# Altium PCB CircleValve.PcbDoc
Units mil, origin at the board's own origin, x right, y up, seen from the top; angles counter-clockwise.
Board outline 2125.98 x 2125.98 mil, 2 copper layers (Top Layer, Bottom Layer); 100 components, 67 nets, 310 pads, 110 vias.
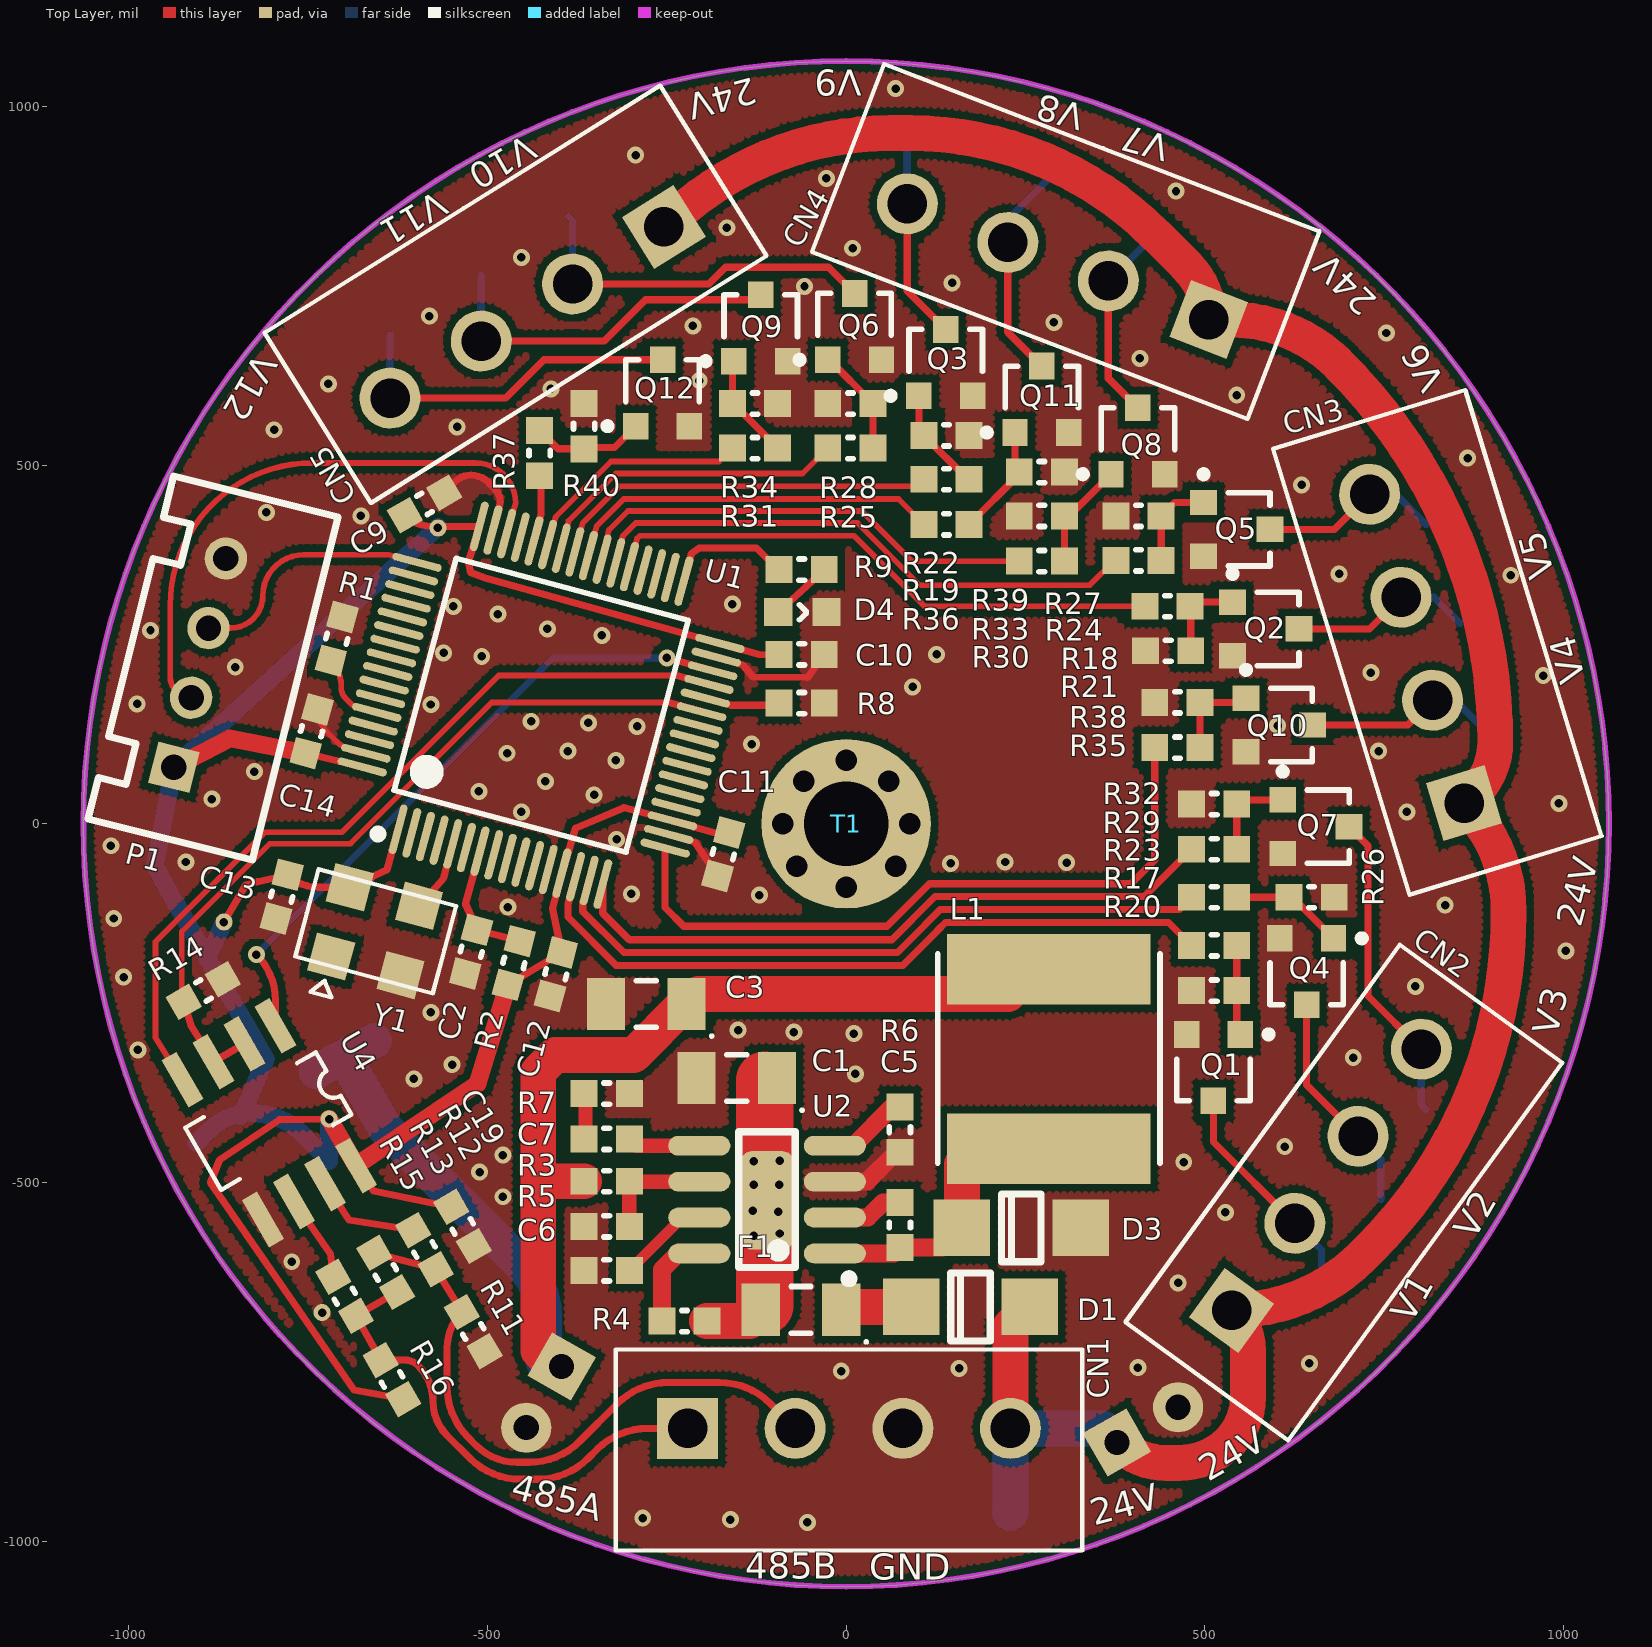
[diagram p0: Top Layer view]
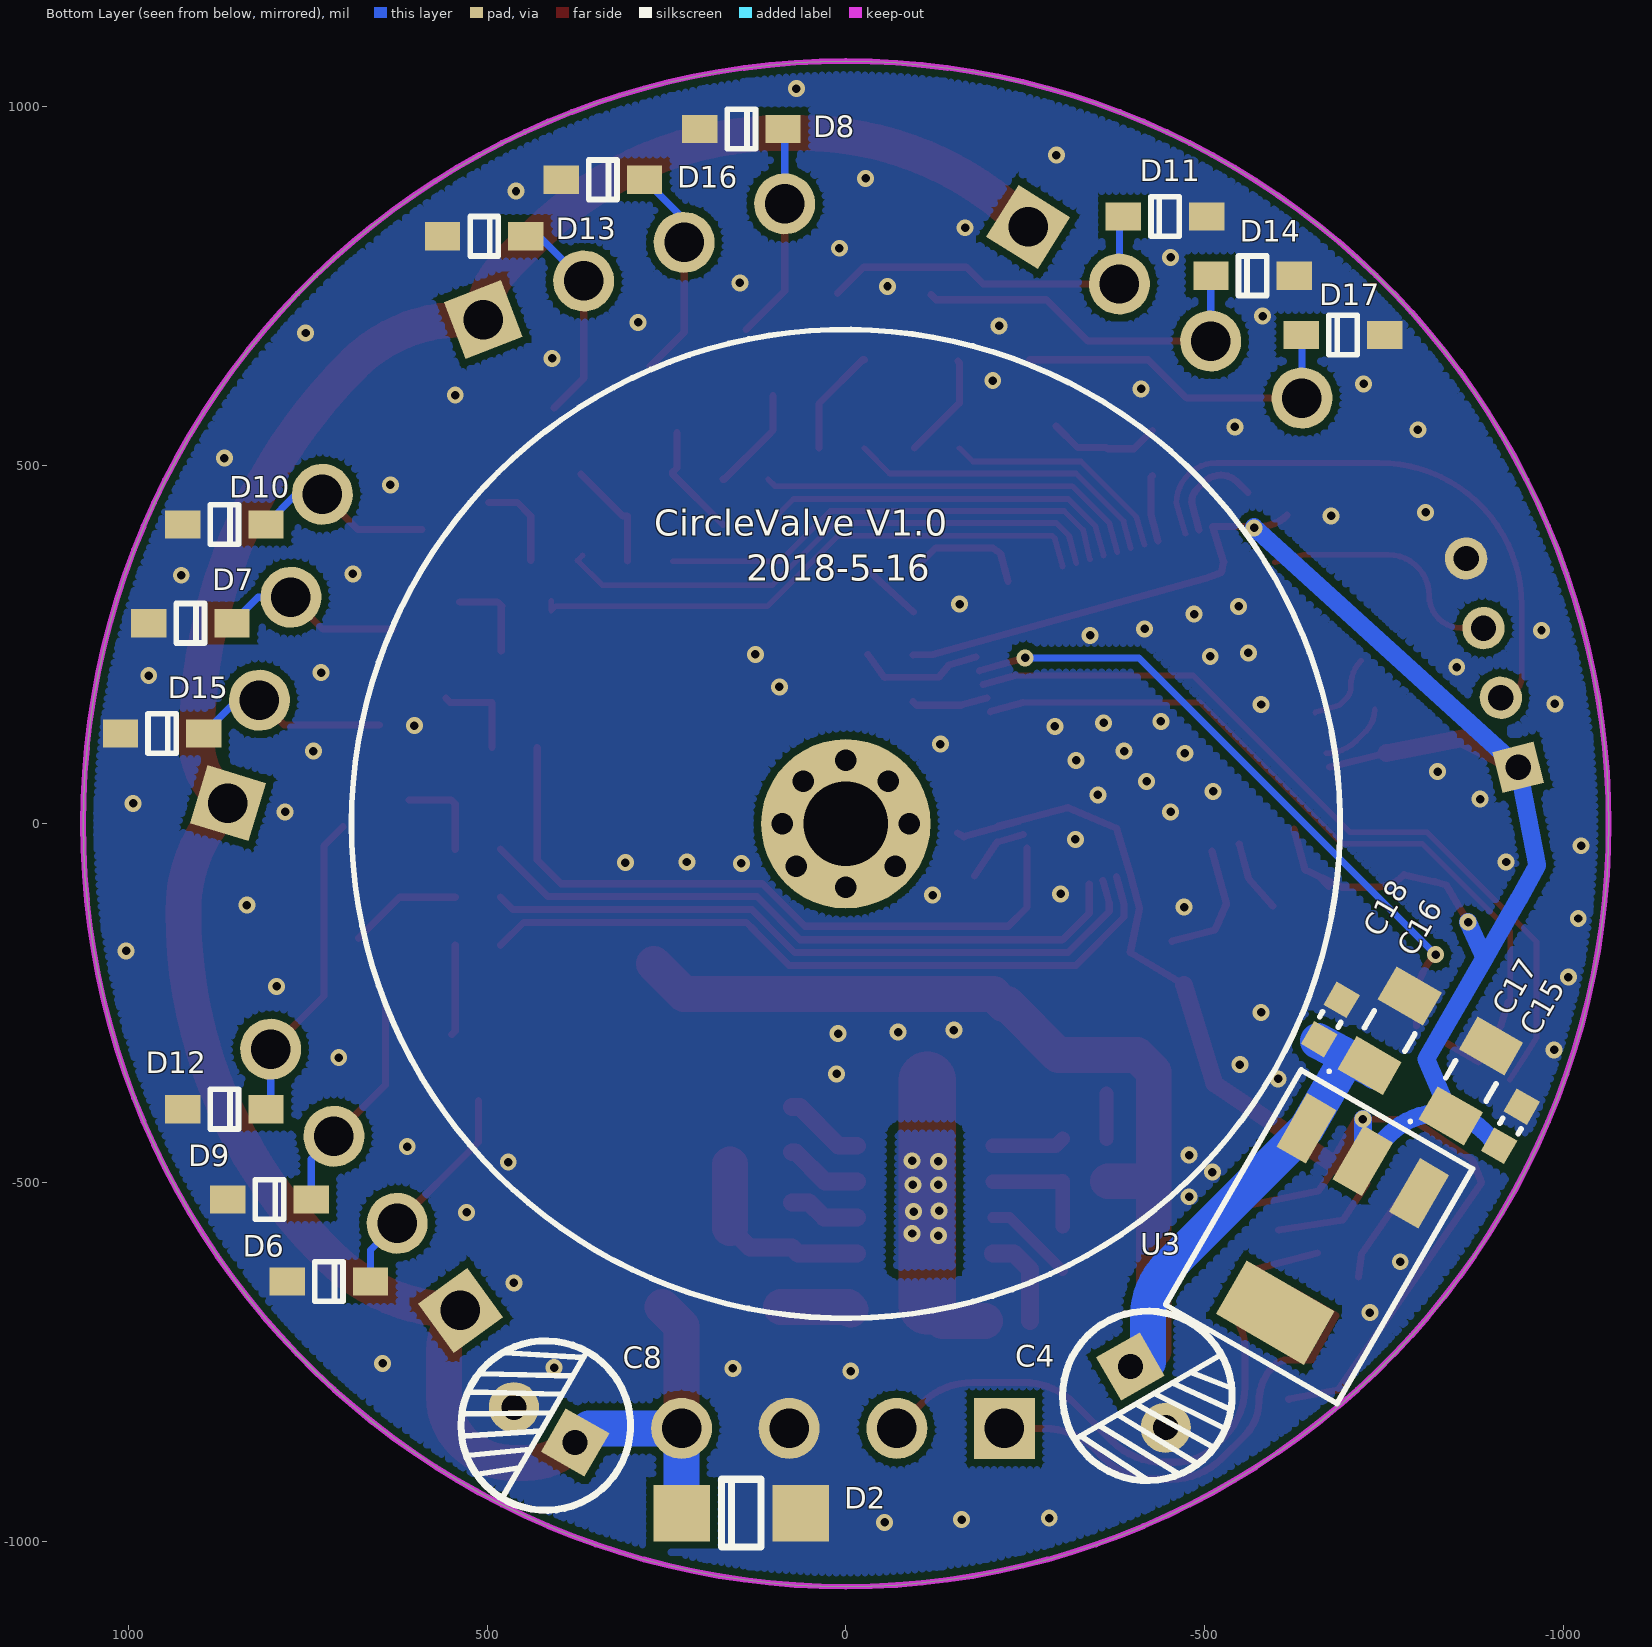
[diagram p1: Bottom Layer view, seen from below]
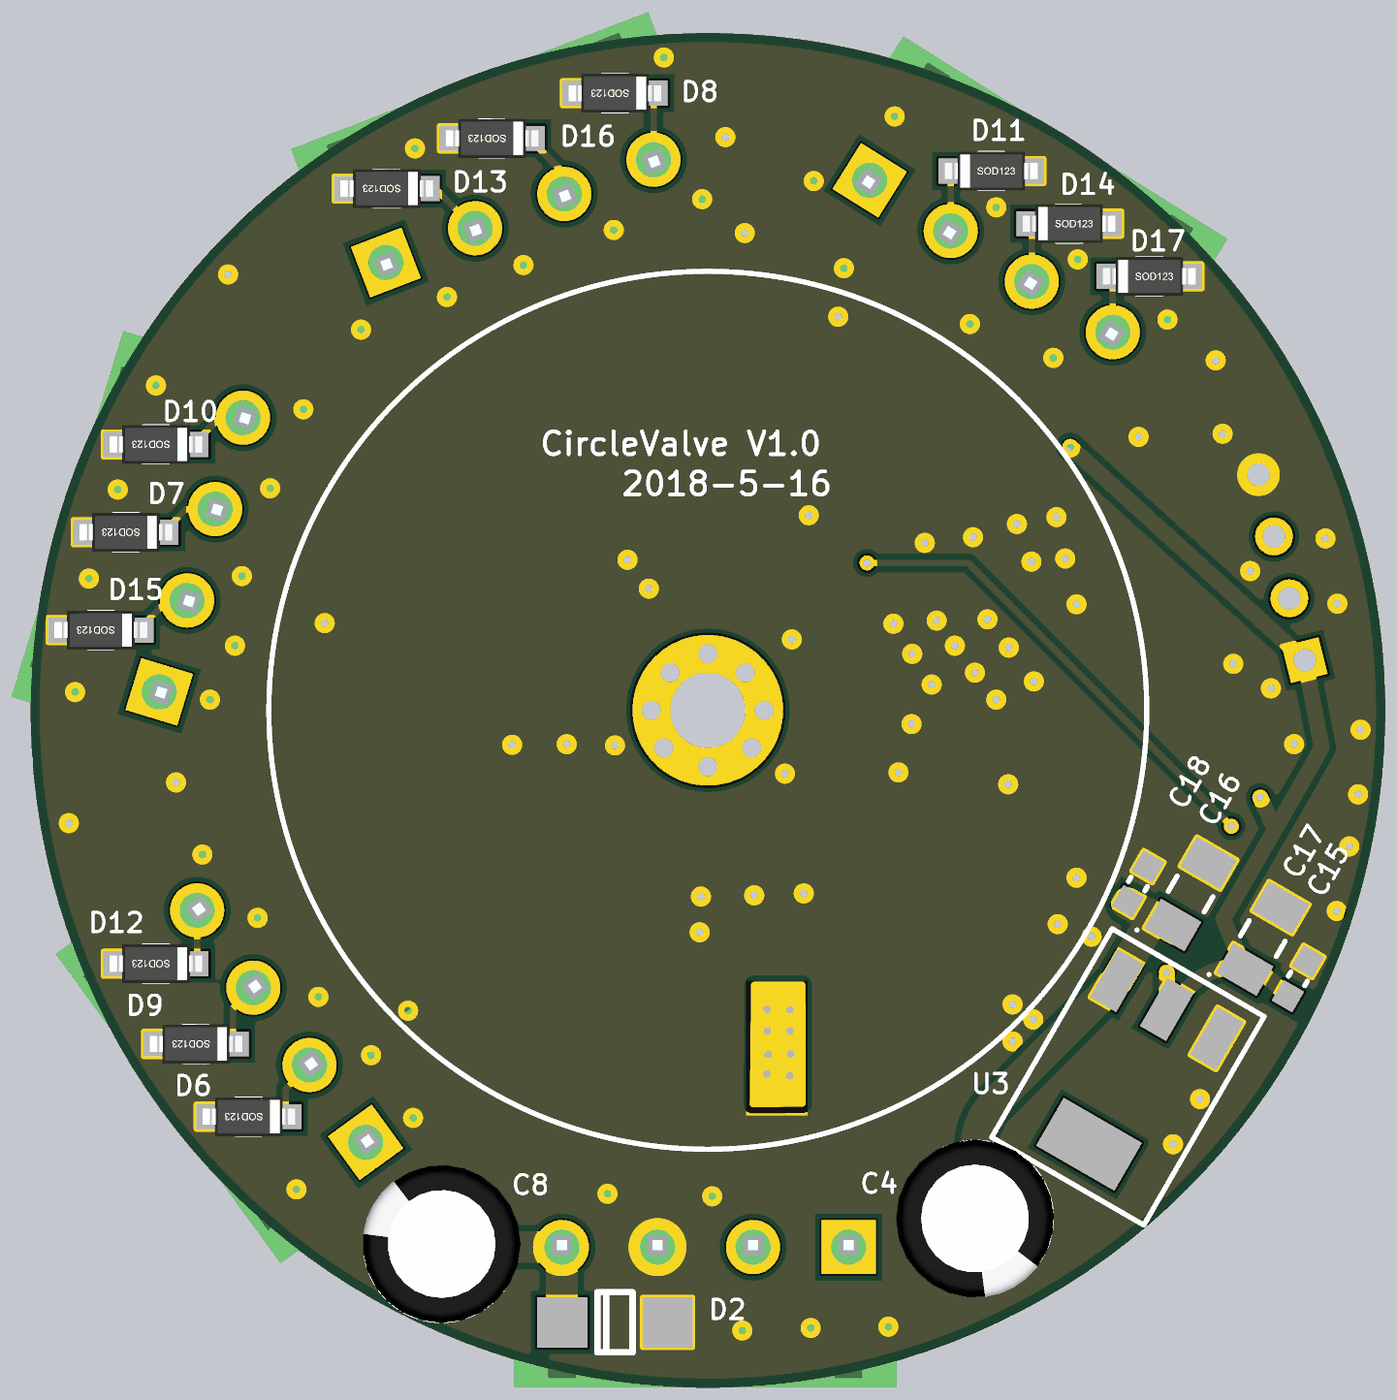
[diagram p2: 3D render of the assembled board from below, using the file's embedded part models]

## Layer stack, top to bottom
Top Layer: signal copper 1.4
Dielectric: dielectric 12.6, FR-4, Dk 4.8
Bottom Layer: signal copper 1.4

## Board outline
-1063.23,-0.2 ccw(c-0.24,-0.2) -0.24,-1063.19 ccw(c-0.24,-0.2) 1062.76,-0.2 ccw(c-0.24,-0.2) -0.24,1062.8 ccw(c-0.24,-0.2)

## Design rules (kind name [scope] priority, off if disabled: settings)
Clearance [All] p1: gap=8
ComponentClearance [All] p1 off: gap=10 collisioncheckmode=3 verticalgap=10 showdistances=FALSE
PlaneConnect [All] p1: planeconnectstyle=Direct reliefexpansion=20 reliefentries=4 reliefconductorwidth=10 reliefairgap=10
PolygonConnect [All] p1: connectstyle=Direct reliefconductorwidth=10 reliefentries=4 polygonreliefangle="90 Angle" airgapwidth=10
RoutingVias [All] p1: holewidth=28 width=50 viastyle="Through Hole" minholewidth=28 minwidth=50 maxholewidth=28 maxwidth=50
SolderMaskExpansion [All] p1: expansion=4
Width [All] p1: maxlimit=100 minlimit=6 preferedwidth=10
26 further rules are at their usual default settings.

## Classes and differential pairs
component class Surface: CN2 CN3 CN4 CN5 D6 D7 D8 D9 D10 D11 D12 D13 D14 D15 D16 D17 Q1 Q2 Q3 Q4 Q5 Q6 Q7 Q8 Q9 Q10 Q11 Q12 R17 R18 R19 R20 R21 R22 R23 R24 R25 R26 R27 R28 R29 R30 R31 R32 R33 R34 R35 R36 R37 R38 R39 R40
component class CircleValve: C1 C2 C3 C4 C5 C6 C7 C8 C9 C10 C11 C12 C13 C14 C15 C16 C17 C18 C19 CN1 D1 D2 D3 D4 F1 L1 P1 R1 R2 R3 R4 R5 R6 R7 R8 R9 R11 R12 R13 R14 R15 R16 T1 U1 U2 U3 U4 Y1

## Components (designator, comment, footprint, x,y, rotation, side; value= is the part's Value field where it differs from the comment)
C1 "10uf 50V" C1206 -152.56,-354.33 r180 top
C2 "104" C0603 -522.64,-178.15 r255 top
C3 "10uF 16V" C1206 -278.54,-250.98 r180 top
C4 "100uF/10V 5*7" "CAP D=6mm" -365.16,-819.88 r60 bottom
C5 "100nF" C0603 74.8,-559.05 r270 top
C6 "100nF" C0603 -333.66,-622.35 r180 top
C7 "2.2nF" C0603 -333.66,-438.98 r180 top
C8 "100uF/35V 6.3*7" "CAP D=6mm" 381.89,-791.34 r210 bottom locked
C9 "104" C0603 -587.6,445.87 r210 top
C10 "104" C0603 -62.01,236.22 r180 top
C11 "104" C0603 -171.26,-42.32 r75 top
C12 "104" C0603 -404.53,-209.65 r75 top
C13 "104" C0603 -786.42,-101.38 r75 top
C14 "104" C0603 -745.08,128.94 r255 top
C15 "104" C0603 -926.18,-421.26 r300 bottom
C16 "10uF 16V" C1206 -757.87,-288.39 r120 bottom
C17 "10uF 16V" C1206 -871.06,-358.27 r120 bottom
C18 "104" C0603 -675.2,-272.64 r300 bottom
C19 "104" C0603 -534.45,-561.02 r120 top
CN1 "CON_3.81_4P_DECA_ME040_381" ME040_381_4P_VC-1 3.94,-842.52 r0 top locked
CN2 "CON_3.81_4P_DECA_ME040_381" ME040_381_4P_VC-1 669.29,-496.06 r54 top locked
CN3 "CON_3.81_4P_DECA_ME040_381" ME040_381_4P_VC-1 795.28,244.09 r107 top locked
CN4 "CON_3.81_4P_DECA_ME040_381" ME040_381_4P_VC-1 295.28,783.46 r159 top locked
CN5 "CON_3.81_4P_DECA_ME040_381" ME040_381_4P_VC-1 -444.88,712.6 r212 top locked
D1 "SK54" LC-SMA(DO-214AC)_S3 173.23,-673.23 r0 top
D2 "SMAJ30CA" LC-SMA(DO-214AC)_S3 145.67,-960.63 r180 bottom
D3 "SK54" LC-SMA(DO-214AC)_S3 244.09,-562.99 r0 top
D4 "LED" LED_M -61.02,295.28 r0 top
D6 "1N4007" LC-SOD-123 720.47,-637.8 r0 bottom
D7 "1N4007" LC-SOD-123 913.39,279.53 r0 bottom
D8 "1N4007" LC-SOD-123 145.67,968.5 r0 bottom
D9 "1N4007" LC-SOD-123 803.15,-523.62 r0 bottom
D10 "1N4007" LC-SOD-123 866.14,417.32 r0 bottom
D11 "1N4007" LC-SOD-123 -444.88,846.46 r180 bottom
D12 "1N4007" LC-SOD-123 866.14,-397.64 r0 bottom
D13 "1N4007" LC-SOD-123 503.94,818.9 r0 bottom
D14 "1N4007" LC-SOD-123 -566.93,763.78 r180 bottom
D15 "1N4007" LC-SOD-123 952.76,125.98 r0 bottom
D16 "1N4007" LC-SOD-123 338.58,897.64 r0 bottom
D17 "1N4007" LC-SOD-123 -692.91,681.1 r180 bottom
F1 "3A 32V" C1206 -62.99,-677.17 r180 top
L1 "10uH" L_SOP74 282.48,-452.76 r90 top
P1 "Header 4" Header4-2.54mm -937.01,78.74 r76 top locked
Q1 "SS8050" SOT-23R 511.81,-334.65 r180 top
Q2 "SS8050" SOT-23R 579.72,271.65 r270 top
Q3 "SS8050" SOT-23R 138.78,637.8 r0 top
Q4 "SS8050" SOT-23R 641.73,-200.79 r180 top
Q5 "SS8050" SOT-23R 539.37,410.43 r270 top
Q6 "SS8050" SOT-23R 11.81,687.99 r0 top
Q7 "SS8050" SOT-23R 649.61,-3.94 r270 top
Q8 "SS8050" SOT-23R 406.5,528.54 r0 top
Q9 "SS8050" SOT-23R -119.09,686.02 r0 top
Q10 "SS8050" SOT-23R 598.43,137.8 r270 top
Q11 "SS8050" SOT-23R 272.64,586.61 r0 top
Q12 "SS8050" SOT-23R -255.91,595.47 r0 top
R1 "10K" R0603 -713.58,259.84 r75 top
R2 "10K" R0603 -466.54,-191.93 r75 top
R3 "52.3k 1%" R0603 -334.65,-501.97 r180 top
R4 "100k" R0603 -224.41,-688.98 r0 top
R5 "10k 1%" R0603 -332.68,-557.09 r0 top
R6 "200k" R0603 70.87,-425.2 r90 top
R7 "10k" R0603 -334.65,-379.92 r180 top
R8 "10K" R0603 -62.99,164.37 r180 top
R9 "1k" R0603 -61.02,358.27 r0 top
R11 "3K" R0603 -523.62,-708.66 r120 top
R12 "5R" R0603 -591.54,-594.49 r120 top
R13 "120R" R0603 -637.8,-624.02 r300 top
R14 "10K" R0603 -894.68,-236.22 r210 top
R15 "5R" R0603 -702.76,-659.45 r120 top
R16 "3K" R0603 -636.81,-775.59 r120 top
R17 "1k" R0603 511.81,-173.23 r180 top
R18 "1k" R0603 446.85,299.21 r180 top
R19 "1k" R0603 138.78,476.38 r180 top
R20 "10k" R0603 511.81,-236.22 r180 top
R21 "10k" R0603 447.83,237.2 r180 top
R22 "10k" R0603 140.75,545.28 r0 top
R23 "1k" R0603 511.81,-106.3 r180 top
R24 "1k" R0603 406.5,363.19 r180 top
R25 "1k" R0603 4.92,519.69 r180 top
R26 "10k" R0603 649.61,-98.43 r0 top
R27 "10k" R0603 406.5,425.2 r180 top
R28 "10k" R0603 4.92,581.69 r180 top
R29 "1k" R0603 511.81,-39.37 r180 top
R30 "1k" R0603 271.65,362.2 r180 top
R31 "1k" R0603 -127.95,519.69 r180 top
R32 "10k" R0603 511.81,23.62 r180 top
R33 "10k" R0603 271.65,425.2 r180 top
R34 "10k" R0603 -125.98,589.57 r0 top
R35 "1k" R0603 460.63,102.36 r180 top
R36 "1k" R0603 138.78,413.39 r180 top
R37 "1k" R0603 -423.23,515.75 r270 top
R38 "10k" R0603 460.63,165.35 r180 top
R39 "10k" R0603 273.62,494.09 r0 top
R40 "10k" R0603 -369.09,555.12 r90 top
T1 "TP" 定位孔3mm 0,0 r0 top
U1 "STM32RCT6" LC-LQFP-64_10x10x05P -425.2,165.35 r345 top
U2 "AOZ1284" LC-SOP-8_150mil -110.24,-523.62 r90 top
U3 "1117M3 330" LT1117 -598.43,-681.1 r30 bottom
U4 "SP3485" SO8 -795.28,-281.5 r210 top
Y1 "SG5032CAN-8M" XTAL-4P-5*3MM -656.5,-149.61 r345 top

## Footprints (in the part's own frame and the unit in brackets; to place one, negate y for a bottom-side part, rotate by r counter-clockwise, add the part's x,y. Pads: shape width x height; smd on the part's side, far side on the other; paste and mask are expansions set on the pad)
C0603 [mm] "Chip Capacitor, 2-Leads, Body 1.85x0.88mm, IPC Medium Density"
  rect 0.95x0.95 smd: 1(-0.8,0) 2(0.8,0)
  silkscreen extent -0.1,-0.37 0.1,0.38, body extent -0.95,-0.48 0.95,0.48, height 0.6
C1206 [mm] "Chip Capacitor, 2-Leads, Body 3.20x1.60mm, IPC Medium Density"
  rect 1.35x1.85 smd: 1(-1.425,0) 2(1.425,0)
  silkscreen extent -2.36,-0.82 0.35,1.19, body extent -1.7,-0.9 1.7,0.9, height 1.8
"CAP D=6mm" [mil]
  rect 70x70 hole 35: 1(39.37,-59.06)
  round 70 hole 35: 2(-59.06,-59.06)
  silkscreen extent -126,-177 110,59, body extent -131,-182 116,66, height 433
Header4-2.54mm [mm]
  rect 1.5x1.5 hole 0.9: 1(0,0)
  round 1.5 hole 0.9: 2(2.54,0) 3(5.08,0) 4(7.62,0)
  silkscreen extent -2.5,-3.5 10,2.5
L_SOP74 [mm]
  rect 2.5x7.2 smd: 1(0,0) 2(6.35,0)
  silkscreen extent -0.51,-3.94 6.89,3.94
LC-LQFP-64_10x10x05P [mm]
  oval 0.28x1.8 smd mask+0.051: 1(-3.75,-5.55) 2(-3.25,-5.55) 3(-2.75,-5.55) 4(-2.25,-5.55) 5(-1.75,-5.55) 6(-1.25,-5.55) 7(-0.75,-5.55) 8(-0.25,-5.55) 9(0.25,-5.55) 10(0.75,-5.55) 11(1.25,-5.55) 12(1.75,-5.55) 13(2.25,-5.55) 14(2.75,-5.55) 15(3.25,-5.55) 16(3.75,-5.55) 33(3.75,5.55) 34(3.25,5.55) 35(2.75,5.55) 36(2.25,5.55) 37(1.75,5.55) 38(1.25,5.55) 39(0.75,5.55) 40(0.25,5.55) 41(-0.25,5.55) 42(-0.75,5.55) 43(-1.25,5.55) 44(-1.75,5.55) 45(-2.25,5.55) 46(-2.75,5.55) 47(-3.25,5.55) 48(-3.75,5.55)
  oval 1.8x0.28 smd mask+0.051: 17(5.55,-3.75) 18(5.55,-3.25) 19(5.55,-2.75) 20(5.55,-2.25) 21(5.55,-1.75) 22(5.55,-1.25) 23(5.55,-0.75) 24(5.55,-0.25) 25(5.55,0.25) 26(5.55,0.75) 27(5.55,1.25) 28(5.55,1.75) 29(5.55,2.25) 30(5.55,2.75) 31(5.55,3.25) 32(5.55,3.75) 49(-5.55,3.75) 50(-5.55,3.25) 51(-5.55,2.75) 52(-5.55,2.25) 53(-5.55,1.75) 54(-5.55,1.25) 55(-5.55,0.75) 56(-5.55,0.25) 57(-5.55,-0.25) 58(-5.55,-0.75) 59(-5.55,-1.25) 60(-5.55,-1.75) 61(-5.55,-2.25) 62(-5.55,-2.75) 63(-5.55,-3.25) 64(-5.55,-3.75)
  silkscreen extent -4.55,-6.05 4.25,4.25
LC-SMA(DO-214AC)_S3 [mm]
  rect 2x2 smd: 1(2.1,0) 2(-2.1,0)
  silkscreen extent -0.7,-1.2 0.7,1.2
LC-SOD-123 [mm]
  rect 1.25x1 smd: 1(1.475,0) 2(-1.475,0)
  silkscreen extent -0.5,-0.7 0.5,0.7, body extent -1.85,-0.77 1.85,0.78, height 1.35
LC-SOP-8_150mil [mm]
  oval 0.7x2.2 smd: 1(-1.905,-2.4) 2(-0.635,-2.4) 3(0.635,-2.4) 4(1.905,-2.4) 5(1.905,2.4) 6(0.635,2.4) 7(-0.635,2.4) 8(-1.905,2.4)
  rrect50% 3.5x2 smd: 9(-0.025,0)
  silkscreen extent -2.95,-3.05 2.4,1, body extent -2.5,-3.1 2.5,3.1, height 1.75
LED_M [mm]
  rect 1x1 smd: 1(-0.85,0) 2(0.85,0)
  silkscreen extent -0.1,-0.28 0.13,0.25
LT1117 [mm]
  rect 1.2x2.2 smd: 1(-2.3,-6.2) 2(0,-6.2) 3(2.3,-6.2)
  rect 3.6x2.2 smd: 4(0,0)
  silkscreen extent -3.5,-7.9 3.5,1.7
ME040_381_4P_VC-1 [mil] "垂直安装"
  rect 85x85 hole 55 mask+3: 1(-225,0)
  round 85 hole 55 mask+3: 2(-75,0) 3(75,0) 4(225,0)
  silkscreen extent -325,-170 325,110, body extent -323,-219 323,190, height 876
R0603 [mm]
  rect 0.95x0.95 smd: 1(-0.825,-0.1) 2(0.775,-0.1)
  silkscreen extent -0.13,-0.48 0.07,0.28, body extent -0.98,-0.58 0.93,0.38, height 0.4
SO8 [mil]
  rect 24x76 smd: 1(0,0) 2(50,0) 3(100,0) 4(150,0) 5(150,225) 6(100,225) 7(50,225) 8(0,225)
  silkscreen extent -30,60 180,160, body extent -32,56 182,161, height 79
SOT-23R [mm]
  rect 0.9x0.95 smd: 1(0.95,-1.048) 2(-0.95,-1.048) 3(0,1.302)
  silkscreen extent -2.07,-1.17 1.3,1.3
XTAL-4P-5*3MM [mm]
  rect 1.4x1.4 smd: 1(-1.27,-1.27) 2(1.27,-1.27) 3(1.27,1.27) 4(-1.27,1.27)
  silkscreen extent -2.5,-2.67 2.54,1.6, body extent -2.58,-1.68 2.62,1.68, height 1.3
定位孔3mm [mil] "3*6mm"
  round 30 hole 30: 1(0,88.58) 2(88.58,0) 3(0,-88.58) 4(-88.58,0) 5(59.06,59.06) 6(68.9,-59.06) 7(-68.9,-59.06) 8(-59.06,59.06)
  round 236.22 hole 118.11: 9(0,0)

## Part data
C1 C16 C17: library part CAP1
C2 C3 C5 C6 C7 C9 C10 C11 C12 C13 C14 C15 C18 C19: library part CAP
C4 C8: library part "Cap Pol1", "Polarized Capacitor (Radial)"
CN1 CN2 CN3 CN4 CN5: "DECA connector,3.81mm,1*4P,180度"
D1 D3 D6 D7 D8 D9 D10 D11 D12 D13 D14 D15 D16 D17: library part D, "1N4148"
D2: library part SMBJ, "TVS"
F1: library part FUSE
L1: library part 差模电感
P1: "Header, 4-Pin"
Q1 Q2 Q3 Q4 Q5 Q6 Q7 Q8 Q9 Q10 Q11 Q12: library part NPN, "8050/BCW846/BCW847"
R1 R2 R3 R4 R5 R6 R7 R8: library part RES
R9 R11 R12 R13 R14 R15 R16 R17 R18 R19 R20 R21 R22 R23 R24 R25 R26 R27 R28 R29 R30 R31 R32 R33 R34 R35 R36 R37 R38 R39 R40: library part R, "标贴电阻"
U1: library part STM32RBT6
U3: library part LT1117
U4: library part RS485
Y1: library part XTAL_POWER

## Via types
v1: diameter 23.62, hole 11.81, Top Layer to Bottom Layer, 110 vias

## Nets (pads, with @x,y where several pads share a name; then routed paths per layer and width w, separated by ;. In a path a pad name is that pad's centre, name@x,y a point inside that pad or via, vN(x,y) a via of type N, cw(c..) or ccw(c..) an arc to the next point about the centre after c; other vN are vias at no path point)
3V3: C9.2 C10.2 C11.2 C12.2 C13.2 C14.2 C15.2 C17.1 C19.2 P1.1 R2.1 R16.1 U1.1 U1.13 U1.19 U1.32 U1.48 U1.64 U3.2 U4.8 Y1.4 | length 4338.9
  Top Layer w8: Y1.4@-673.01,-88.37 -656.42,-71.78
  Top Layer w10: v1(-867.13,-136.81) -836.9,-85.35 -820.87,-80.71 C13.2 ccw(c-736.23,-28.92) -736.23,-88.37 Y1.4 -656.42,-71.78 -639.76,-63.98 U1.1 ; C14.2 U1.64 ; v1(-720.47,-411.42) -790.35,-412.4 -873.44,-468.37 -886,-499.99 -685.81,-788.94 R16.1 ; U4.8 -658.89,-511.78 C19.2 ; C9.2 ccw(c-577.47,467.52) -577.47,414.62 U1.48 -526.57,365.16 -523.62,350.39 -502.95,342.52 U1.32 -121.06,236.22 C10.2@-93.57,235.24 ; R2.1 C12.2 -409.45,-118.11 U1.13 -376.97,-5.91 -313.98,20.67 -310.04,22.64 -242.01,4.79 U1.19@-211.86,-3.11 ; U1.19 -212.21,-4.33 -164.7,-17.9 C11.2@-155.51,-12.8
  Top Layer w25: P1.1 -859.25,119.09 C14.2 ; v1(-720.47,-411.42) U4.8 -513.78,-362.2 R2.1
  Bottom Layer w25: C15.2@-905.51,-444.6 -888.68,-427.77 cw(c-828.69,-487.76) C17.1@-841.76,-403.93 ; v1(-867.13,-136.81) -890.04,-187.43 ; C17.1 C17.1@-841.76,-403.93 ; C17.1@-828.69,-402.92 cw(c-828.69,-502.92) -757.98,-432.21 U3.2 v1(-720.47,-411.42) ; v1@-568.89,413.48 P1.1 -963.58,-58.07 -937.99,-104.33 -900.1,-169.99 -890.04,-187.43 ; -890.04,-187.43 -809.06,-327.76 C17.1@-841.76,-403.93
  other v1: -568.9,412.4
5V: C3.1 C4.1 C16.1 C18.2 L1.2 R3.2 U3.3 | length 1860.5
  Top Layer w50: C4.1@-409.45,-753.94 -429.13,-734.25 -429.13,-486.22 ; R3.2 -417.32,-498.03 -429.13,-486.22 ; C3.1 -224.98,-250.98 -296.16,-322.16 -405.82,-322.16 -429.13,-345.47 -429.13,-486.22 ; C3.1@-219.49,-250.98 -205.71,-237.2 225.39,-237.2 L1.2@267.72,-194.88
  Bottom Layer w50: C16.1@-738.04,-344.87 C16.1@-699.51,-324.58 ; C18.2@-657.98,-302.71 C16.1@-699.51,-324.58 ; C4.1@-421.22,-750.35 -421.22,-686.69 ccw(c-521.22,-686.69) -450.51,-615.97 U3.3 -698.95,-325.54 C16.1@-699.51,-324.58
24V: C8.1 CN1.4 CN2.1 CN3.1 CN4.1 CN5.1 D1.1 D2.2 | length 3514.1
  Top Layer w50: CN5.1 cw(c61.63,516.13) 61.63,962.6 88.94,962.6 cw(c88.94,478.71) 431.1,820.87 474.36,777.61 cw(c399.58,702.83) CN4.1 535.56,702.83 cw(c535.56,489.45) 686.44,640.34 cw(c159.92,113.82) 904.53,113.82 cw(c804.53,113.82) 875.24,43.11 CN3.1 cw(c710.97,-121.16) 923.23,-121.16 923.23,-124.32 cw(c261,-124.32) 729.27,-592.58 719.22,-602.63 cw(c537.04,-420.45) CN2.1 cw(c531.99,-683.14) 539.13,-683.14 cw(c488.66,-733.62) 560.04,-733.62 560.04,-799.1 cw(c471.85,-799.1) 534.21,-861.46 cw(c463.5,-790.75) 463.5,-890.75 446.32,-890.75 cw(c446.32,-793.17) C8.1 ; CN1.4 228.94,-700.2 D1.1
  Bottom Layer w50: D2.2 228.94,-960.04 CN1.4 357.67,-842.52 C8.1
485A: CN1.1 R13.2 R15.1 R16.2 | length 679.6
  Top Layer w10: R13.2 R15.1 R16.2 -615.1,-747.2 cw(c-615.1,-773.57) -596.46,-754.92 cw(c-646.36,-804.82) -575.79,-804.82 ccw(c-508.73,-804.82) -556.15,-852.24 ; -562.99,-843.5 ccw(c-558.24,-843.5) -561.6,-846.86 ; -556.18,-852.28 -524.37,-884.1 ccw(c-453.66,-813.39) -453.66,-913.39 -430.2,-913.39 ccw(c-430.2,-813.39) -359.49,-884.1 -347.2,-871.81 cw(c-276.49,-942.52) -276.49,-842.52 CN1.1
485B: CN1.2 R11.2 R12.1 R13.1 | length 872.9
  Top Layer w10: R13.1 R12.1 R11.2 ccw(c-485.65,-730.08) -556.1,-730.08 -556.1,-784.37 ccw(c-456.1,-784.37) -526.81,-855.08 -515.75,-866.14 ccw(c-458.72,-809.11) -458.72,-889.76 -442.01,-889.76 ccw(c-442.01,-789.76) -371.3,-860.47 -318.66,-807.83 cw(c-247.95,-878.54) -281.32,-784.28 cw(c-247.95,-878.54) -247.95,-778.54 -176.46,-778.54 cw(c-176.46,-878.54) -105.75,-807.83 CN1.2
GND: C1.2 C2.2 C3.2 C4.2 C6.2 C8.2 C9.1 C10.1 C11.1 C12.1 C13.1 C14.1 C15.1 C16.2 C17.2 C18.1 C19.1 CN1.3 D2.1 D3.1 D4.2 D6.1 D7.1 D8.1 D9.1 D10.1 D11.1 D12.1 D13.1 D14.1 D15.1 D16.1 D17.1 P1.4 Q1.1 Q2.1 Q3.1 Q4.1 Q5.1 Q6.1 Q7.1 Q8.1 Q9.1 Q10.1 Q11.1 Q12.1 R1.2 R5.1 R6.1 R7.1 R8.1 R11.1 R14.1 R20.2 R21.2 R22.2 R26.2 R27.2 R28.2 R32.2 R33.2 R34.2 R38.2 R39.2 R40.2 U1.12 U1.18 U1.31 U1.47 U1.63 U2.3 U3.1 U4.5 Y1.2 | length 621.4
  Top Layer w8: C14.1 ccw(c-693.7,159.36) -724.27,128.79 -711.05,115.58 ccw(c-669.37,157.26) U1.63
  Top Layer w10: C9.1 -545.42,476.52 cw(c-522.64,453.73) -522.64,485.95 cw(c-522.64,452.04) -498.66,476.02 -489.49,466.85 cw(c-507.52,448.82) -482.02,448.82 ; U1.47 -482.58,445.95 ; U1.18 -210.63,-25.59 C11.1 ; U1.31 -143.7,221.46 -129.92,204.72 -54.13,203.74 C10.1
  Top Layer w25: U2.3 28.94,-498.62 69.88,-457.68 R6.1
  other v1: -54.13,-973.43 -161.42,-969.49 -283.46,-967.52 -6.89,-762.8 157.48,-758.86 406.5,-757.87 645.67,-751.97 -730.32,-681.1 462.6,-639.76 -772.64,-610.24 528.54,-541.34 -478.35,-519.68 -510.83,-485.24 470.47,-471.46 -478.35,-461.61 611.22,-449.8 -602.36,-355.32 12.8,-348.43 -549.21,-335.63 706.69,-325.79 -987.2,-314.96 10.83,-292.32 -72.83,-290.35 -150.59,-287.4 -578.74,-262.8 793.31,-226.38 -1006.89,-213.58 1002.95,-177.17 -1020.67,-131.89 -471.46,-116.14 834.65,-113.19 -121.06,-99.41 -299.21,-97.44 145.67,-55.12 307.09,-54.13 -920.28,-53.15 221.46,-53.15 -1024.61,-30.51 -319.88,-21.65 -452.76,16.73 781.5,16.73 993.11,28.54 -883.86,34.45 -351.38,40.35 -511.81,45.28 -419.29,59.06 -824.8,72.83 -320.87,88.58 -472.44,98.43 -387.8,101.38 742.13,101.38 -131.89,111.22 -291.34,135.83 601.38,136.81 -359.25,140.75 -438.98,142.72 -578.74,166.34 -988.19,167.32 92.52,190.94 971.46,206.69 731.3,210.63 -851.38,218.5 -507.87,233.27 125.98,236.22 -561.02,238.19 -340.55,262.8 -969.49,269.69 -416.34,271.65 -485.24,292.32 -547.24,303.15 -158.46,306.1 926.18,346.46 687.01,348.43 -676.18,429.13 -808.07,434.06 634.84,472.44 866.14,509.84 -797.24,549.21 -542.32,553.15 544.29,597.44 -411.42,606.3 -721.46,613.19 -204.72,617.7 409.45,648.62 752.95,684.06 -213.58,693.9 289.37,698.82 -580.71,707.68 -58.07,749.02 147.64,753.94 -452.76,789.37 8.86,802.17 -166.34,830.71 459.65,881.89 -27.56,899.61 -293.31,932.09 68.9,1024.61
NetC5_1: C5.1 U2.2 | length 99.3
  Top Layer w25: U2.2 30.12,-548.62 51.18,-527.56 C5.1
NetC5_2: C5.2 D3.2 L1.1 U2.1 | length 280.5
  Top Layer w25: U2.1 66.73,-598.62 C5.2 133.86,-590.55 D3.2
  Top Layer w50: D3.2 L1.1@161.42,-474.41
NetC6_1: C6.1 U2.7 | length 128
  Top Layer w15: C6.1 -228.43,-548.62 U2.7
NetC7_1: C7.1 U2.5 | length 101.4
  Top Layer w20: C7.1 -292.52,-448.62 U2.5
NetC7_2: C7.2 R7.2 | length 63
  Top Layer w20: C7.2@-363.19,-438.98 R7.2@-363.19,-375.98
NetD1_2: D1.2 F1.1 | length 99.1
  Top Layer w50: F1.1 -2.95,-673.23 D1.2
NetD4_1: D4.1 R9.2 | length 86.4
  Top Layer w10: D4.1 R9.2@-30.57,353.35
NetQ1_2: Q1.2 R17.1 R20.1 | length 126.1
  Top Layer w10: R17.1 544.29,-288.46 Q1.2
NetQ2_2: Q2.2 R18.1 R21.1 | length 124
  Top Layer w10: R21.1 480.32,302.17 R18.1 485.24,309.06 Q2.2
NetQ3_2: Q3.2 R19.1 R22.1 | length 146.3
  Top Layer w10: Q3.2 101.38,548.23 R22.1 169.29,480.31 R19.1
NetQ4_2: Q4.2 R23.1 R26.1 | length 158.5
  Top Layer w10: R23.1 R26.1 621.97,-102.36 Q4.2
NetQ5_2: Q5.2 R24.1 R27.1 | length 128.9
  Top Layer w10: R24.1 R27.1 457.68,447.84 Q5.2
NetQ6_2: Q6.2 R25.1 R28.1 | length 150.3
  Top Layer w10: Q6.2 -23.7,646.73 R28.1 R25.1
NetQ7_2: Q7.2 R29.1 R32.1 | length 129.5
  Top Layer w10: R29.1 R32.1 550.2,33.46 Q7.2
NetQ8_2: Q8.2 R30.1 R33.1 | length 152
  Top Layer w10: R30.1 R33.1 310.94,429.13 Q8.2
NetQ9_2: Q9.2 R31.1 R34.1 | length 148.6
  Top Layer w10: Q9.2 -158.46,642.8 R34.1 -157.48,585.63 R31.1
NetQ10_2: Q10.2 R35.1 R38.1 | length 129.5
  Top Layer w10: R35.1 R38.1 551.26,169.29 Q10.2
NetQ11_2: Q11.2 R36.1 R39.1 | length 159.4
  Top Layer w10: R36.1 241.14,487.2 R39.1 235.24,496.06 Q11.2
NetQ12_2: Q12.2 R37.1 R40.1 | length 157.5
  Top Layer w10: R37.1 -401.57,522.64 R40.1 -363.19,524.61 -322.91,524.61 Q12.2
NetR1_1: R1.1 U1.60 | length 106.9
  Top Layer w8: R1.1 cw(c-753.06,192.57) -703.74,192.57 -703.74,189.96 ccw(c-682.35,189.96) -697.49,174.85 -687.99,165.35 U1.60
NetR3_1: R3.1 R5.2 U2.6 | length 158.7
  Top Layer w20: R5.2 R3.1 ; R3.1@-300.2,-498.03 -299.61,-498.62 U2.6
NetR4_1: R4.1 U2.8 | length 133.3
  Top Layer w25: R4.1 -256.89,-621.06 -234.45,-598.62 U2.8
NetR6_2: R6.2 U2.4 | length 112.9
  Top Layer w25: U2.4 10.04,-448.62 63.98,-394.68 R6.2
NetR8_2: R8.2 U1.28 | length 106.1
  Top Layer w10: U1.28 -160.43,165.35 -98.49,165.35 R8.2@-93.57,170.28
NetR12_2: R12.2 U4.7 | length 151.3
  Top Layer w10: U4.7 -692.91,-552.17 R12.2
NetR15_2: R15.2 U4.6 | length 120.9
  Top Layer w10: U4.6 -718.5,-599.41 R15.2
OSCIN: U1.5 Y1.3 | length 101.1
  Top Layer w10: Y1.3 -561.02,-75.79 U1.5
PA0: R17.2 U1.14 | length 993
  Top Layer w10: U1.14 -387.8,-112.2 -387.8,-129.92 -320.3,-197.42 78.89,-197.42 127.75,-148.56 127.75,-148.16 138.53,-137.38 449.39,-137.38 R17.2
PA1: R23.2 U1.15 | length 948.8
  Top Layer w10: U1.15 -367.13,-110.24 -367.13,-122.05 -309.76,-179.42 71.43,-179.42 109.75,-141.1 109.75,-140.7 131.07,-119.38 464.28,-119.38 R23.2
PA2: R29.2 U1.16 | length 928.7
  Top Layer w10: U1.16 -339.14,-124.44 -302.17,-161.42 63.98,-161.42 91.75,-133.65 91.75,-133.25 123.62,-101.38 415.35,-101.38 R29.2
PA3: R35.2 U1.17 | length 971
  Top Layer w10: U1.17 -252.35,-116.74 -226.38,-142.72 56.82,-142.72 116.16,-83.38 396.94,-83.38 430.12,-50.2 R35.2
PA8: R19.2 U1.41 | length 542.5
  Top Layer w8: U1.41 -367.13,419.29 -315.94,470.47 98.42,470.47 R19.2
PA9: R25.2 U1.42 | length 442.8
  Top Layer w8: U1.42 -386.81,422.24 -320.87,488.19 -61.02,488.19 R25.2
PA10: R31.2 U1.43 | length 326.3
  Top Layer w8: U1.43 -404.53,428.15 -327.76,504.92 -177.17,504.92 R31.2
PA11: R37.2 U1.44 | length 93.1
  Top Layer w10: U1.44 -425.2,431.1 -425.2,483.27 R37.2
PA13_JTMS: P1.2 U1.46 | length 816.2
  Top Layer w8: P1.2 cw(c-912.82,204.88) -941.93,204.88 -941.93,304.6 cw(c-743.57,304.6) -743.57,502.95 -516.73,502.95 cw(c-516.73,446.85) -501.96,500.97 cw(c-516.73,446.85) -462.61,461.63 cw(c-516.73,446.85) -460.63,446.85 U1.46
PA14_JTCK: P1.3 U1.49 | length 350.3
  Top Layer w8: P1.3 -858.11,272.8 ccw(c-858.11,317.91) -812.99,317.91 cw(c-755.91,317.91) -755.91,375 -637.8,375 U1.49
PA15: U1.50
PB1_485EN: R14.2 U1.27 U4.2 U4.3 | length 1101.3
  Top Layer w8: R14.2 -925.76,-245.38 -925.76,-150.17 -803.15,-27.56 -690.7,-27.56 -493.85,169.29 -247.05,169.29
  Top Layer w10: R14.2 -912.4,-282.48 U4.3 U4.2 ; -247.05,169.29 U1.27
PB10/U3TX: U1.29 U4.4 | length 1129.8
  Top Layer w8: U4.4 -944.93,-325.74 -962.6,-298.23 -962.6,-164.38 -809.78,-11.56 -702.5,-11.56 -484.25,206.69 -236.22,206.69
  Top Layer w10: -236.22,206.69 U1.29
PB11/U3RX: U1.30 U4.1 | length 915.9
  Top Layer w10: v1(-821.85,-182.09) cw(c-886.01,-246.24) -795.28,-246.24 U4.1 ; v1(-250,231.3) -231.3,226.38 U1.30
  Bottom Layer w10: v1(-821.85,-182.09) -408.46,231.3 v1(-250,231.3)
PB12: R9.1 U1.33 | length 177.4
  Top Layer w10: U1.33 -215.55,376.97 -204.72,384.57 -125,384.57 R9.1@-93.57,353.35
PB13: U1.34
PC6: R18.2 U1.37 | length 800.9
  Top Layer w8: U1.37 -291.34,397.64 -287.4,401.57 10.83,401.57 109.25,303.15 404.53,303.15 410.43,297.24 R18.2@410.43,311.02
PC7: R24.2 U1.38 | length 791.5
  Top Layer w8: U1.38 -311.02,401.57 -293.31,419.29 15.74,419.29 102.35,332.68 339.57,332.68 374.02,367.13 R24.2@367.13,374.02
PC8: R30.2 U1.39 | length 653.6
  Top Layer w8: U1.39 -330.71,409.45 -304.13,436.02 21.63,436.02 91.52,366.14 R30.2
PC9: R36.2 U1.40 | length 529
  Top Layer w8: U1.40 -347.44,415.35 -310.04,452.76 72.83,452.76 R36.2
RESET: C2.1 R2.2 U1.7 | length 177.5
  Top Layer w10: U1.7 -530.51,-111.22 C2.1 R2.2
VALVE1: CN2.2 D6.2 Q1.3 | length 314.3
  Top Layer w10: Q1.3 511.81,-443.34 CN2.2
  Bottom Layer w10: CN2.2 662.4,-593.93 D6.2
VALVE2: CN2.3 D9.2 Q4.3 | length 314.4
  Top Layer w10: Q4.3 641.73,-363.74 CN2.3
  Bottom Layer w10: CN2.3 745.08,-467.09 D9.2
VALVE3: CN2.4 D12.2 Q7.3 | length 438.1
  Top Layer w10: Q7.3 727.36,-30.43 727.36,-239.85 CN2.4
  Bottom Layer w10: CN2.4 801.54,-391.11 D12.2
VALVE4: CN3.2 D15.2 Q10.3 | length 278.5
  Top Layer w10: Q10.3 782.63,137.8 CN3.2
  Bottom Layer w10: CN3.2 848.3,172.37 D15.2
VALVE5: CN3.3 D7.2 Q2.3 | length 257.7
  Top Layer w10: Q2.3 729.18,271.65 CN3.3
  Bottom Layer w10: CN3.3 819.02,315.82 D7.2
VALVE6: CN3.4 D10.2 Q5.3 | length 255
  Top Layer w10: Q5.3 680.66,410.43 CN3.4
  Bottom Layer w10: CN3.4 766.13,459.26 D10.2
VALVE7: CN4.2 D13.2 Q8.3 | length 300.2
  Top Layer w10: CN4.2 365.29,621.01 Q8.3
  Bottom Layer w10: CN4.2 427.6,818.9 D13.2
VALVE8: CN4.3 D16.2 Q11.3 | length 302.3
  Top Layer w10: CN4.3 225.26,685.25 Q11.3
  Bottom Layer w10: CN4.3 225.26,842.38 D16.2
VALVE9: CN4.4 D8.2 Q3.3 | length 302.6
  Top Layer w10: CN4.4 85.22,742.61 Q3.3
  Bottom Layer w10: CN4.4 85.22,966.13 D8.2
VALVE10: CN5.2 D11.2 Q6.3 | length 514.2
  Top Layer w10: CN5.2 -191.56,752.34 -168.31,775.59 -24.53,775.59 Q6.3
  Bottom Layer w10: D11.2 -381.28,840.92 CN5.2
VALVE11: CN5.3 D14.2 Q9.3 | length 507.2
  Top Layer w10: CN5.3 -336.99,672.85 -279.53,730.32 -126.06,730.32 Q9.3
  Bottom Layer w10: D14.2 -508.49,763.41 CN5.3
VALVE12: CN5.4 D17.2 Q12.3 | length 490
  Top Layer w10: CN5.4 -474.55,593.37 -421.18,646.73 Q12.3
  Bottom Layer w10: CN5.4 -635.69,680.25 D17.2
VCC: C1.1 F1.2 R4.2 U2.9 | length 395.5
  Top Layer w50: R4.2 -134.84,-692.91 F1.2
  Top Layer w80: F1.2@-113.42,-671.49 C1.1@-113.42,-357.28
  other v1: -128.94,-573.82 -92.52,-570.87 -94.49,-540.35 -129.92,-539.37 -128.94,-502.95 -93.5,-502.95 -128.94,-470.47 -92.52,-469.49
pads on no net: T1.1 T1.2 T1.3 T1.4 T1.5 T1.6 T1.7 T1.8 T1.9 U1.2 U1.3 U1.4 U1.6 U1.8 U1.9 U1.10 U1.11 U1.20 U1.21 U1.22 U1.23 U1.24 U1.25 U1.26 U1.35 U1.36 U1.45 U1.51 U1.52 U1.53 U1.54 U1.55 U1.56 U1.57 U1.58 U1.59 U1.61 U1.62 U3.4 Y1.1

## Polygon pours and split planes (outlines as drawn)
GND on Bottom Layer "Top Layer-No Net1" (hatched 90Degree grid 10 track 10, remove dead copper, pour order 20): -1063.23,-0.2 ccw(c-0.24,-0.2) -0.24,-1063.19 ccw(c-0.24,-0.2) 1062.76,-0.2 ccw(c-0.24,-0.2) -0.24,1062.8 ccw(c-0.24,-0.2)
VCC on Bottom Layer "Top Layer-No Net" (hatched 90Degree grid 10 track 10, remove dead copper, pour order 17): -148.62,-431.1 -72.83,-431.1 -70.87,-618.11 -148.62,-617.13
GND on Top Layer "Top Layer-No Net" (hatched 90Degree grid 10 track 10, remove dead copper, pour order 15): -1063.23,-0.2 ccw(c-0.24,-0.2) -0.24,-1063.19 ccw(c-0.24,-0.2) 1062.76,-0.2 ccw(c-0.24,-0.2) -0.24,1062.8 ccw(c-0.24,-0.2)

## Keep-outs
Keep-Out Layer:
  circle w8: c0,0 r1062.99

## Silkscreen, mask and mechanical layers (free items; w line width, h text height)
Top Overlay:
  text "V9" at 21.65,1051.18 h36 r180
  text "24V" at -130.91,1040.35 h36 r195
  text "V8" at 334.65,1000.98 h36 r165
  text "V10" at -445.87,961.61 h36 r210
  text "V7" at 452.76,957.68 h36 r165
  text "V11" at -569.88,883.86 h36 r210
  text "24V" at 742.13,730.32 h36 r135
  text "V12" at -821.85,658.46 h36 r240
  text "V6" at 835.63,616.14 h36 r120
  text "V5" at 987.2,347.44 h36 r105
  text "V4" at 1030.51,201.77 h36 r105
  text "24V" at 1023.62,-145.67 h36 r75
  text "V3" at 990.16,-297.24 h36 r75
  text "V2" at 875,-581.69 h36 r60
  text "V1" at 787.4,-697.83 h36 r60
  text "24V" at 504.92,-917.32 h36 r30
  text "485A" at -468.5,-938.98 h36 r345
  text "24V" at 345.47,-978.35 h36 r15
  text "485B" at -140.75,-1052.17 h36
  text "GND" at 32.48,-1053.15 h36
Bottom Overlay:
  circle w8: c0,0 r688.98
  text "CircleValve V1.0" at 266.73,401.57 h36
  text "2018-5-16" at 138.78,338.58 h36
Top Solder:
  rectangle: -146.65,-715.55 -72.83,-316.93
Bottom Solder:
  rectangle: -156.5,-635.83 -60.04,-424.21